# EAGLE board CT_schematic (EAGLE 7.6.0)

Size 100 x 80 mm. Coordinates in mm from the lower left corner, seen from the top.
Outline: 0,0 100,0 100,80 0,80 0,0
Copper layers (1*16): Top 0.035mm / dielectric 1.5mm / Bottom 0.035mm
Design rules "default": minimum track width 10mil, minimum drill 24mil, track to track 8mil, track to pad 8mil, pad to pad 8mil, via to via 8mil, smd to smd 8mil, copper to edge 40mil, drill to drill 8mil, minimum pad ring 10mil, minimum via ring 8mil, stop-mask expansion 4mil, vias tented up to drill 0mil, thermal gap 10mil

## Footprints (pad centres in the part's own frame; a part is rotated, then mirrored left to right if it is on the bottom)
C0603 = smd 0.8 x 0.8: 1 -0.762,0; 2 0.762,0
C0402 = smd 0.5 x 0.5: 1 -0.508,0; 2 0.508,0
C0805 = smd 1.2 x 1.3: 1 -1.016,0; 2 1.016,0
C1210 = smd 1.2 x 2.5: 1 -1.524,0; 2 1.524,0
2220 = smd 1.85 x 5.5: 1 -2.55,0; 2 2.55,0
EXV-9H = smd 3.505 x 1.676: 1 -2.857,0; 2 2.857,0
L0603 = smd 0.8 x 0.8: 1 -0.762,0; 2 0.762,0
WE-HCI_7030/7040/7050 = smd 2.5 x 3: 1 -2.45,0; 2 2.45,0
PJ-037B_PACKAGE = drill 3.7 square: 1 12,0 | drill 3.2 square: 2 6,0
R0603 = smd 0.8 x 0.8: 1 -0.762,0; 2 0.762,0
LQFP64 = smd 0.3 x 1.2: 1 -3.75,-5.75; 2 -3.25,-5.75; 3 -2.75,-5.75; 4 -2.25,-5.75; 5 -1.75,-5.75; 6 -1.25,-5.75; 7 -0.75,-5.75; 8 -0.25,-5.75; 9 0.25,-5.75; 10 0.75,-5.75; 11 1.25,-5.75; 12 1.75,-5.75; 13 2.25,-5.75; 14 2.75,-5.75; 15 3.25,-5.75; 16 3.75,-5.75; 33 3.75,5.75; 34 3.25,5.75; 35 2.75,5.75; 36 2.25,5.75; 37 1.75,5.75; 38 1.25,5.75; 39 0.75,5.75; 40 0.25,5.75; 41 -0.25,5.75; 42 -0.75,5.75; 43 -1.25,5.75; 44 -1.75,5.75; 45 -2.25,5.75; 46 -2.75,5.75; 47 -3.25,5.75; 48 -3.75,5.75 | smd 1.2 x 0.3: 17 5.75,-3.75; 18 5.75,-3.25; 19 5.75,-2.75; 20 5.75,-2.25; 21 5.75,-1.75; 22 5.75,-1.25; 23 5.75,-0.75; 24 5.75,-0.25; 25 5.75,0.25; 26 5.75,0.75; 27 5.75,1.25; 28 5.75,1.75; 29 5.75,2.25; 30 5.75,2.75; 31 5.75,3.25; 32 5.75,3.75; 49 -5.75,3.75; 50 -5.75,3.25; 51 -5.75,2.75; 52 -5.75,2.25; 53 -5.75,1.75; 54 -5.75,1.25; 55 -5.75,0.75; 56 -5.75,0.25; 57 -5.75,-0.25; 58 -5.75,-0.75; 59 -5.75,-1.25; 60 -5.75,-1.75; 61 -5.75,-2.25; 62 -5.75,-2.75; 63 -5.75,-3.25; 64 -5.75,-3.75
SSOP-28 = smd 1.5 x 0.4: 1 -3.625,4.225; 2 -3.625,3.575; 3 -3.625,2.925; 4 -3.625,2.275; 5 -3.625,1.625; 6 -3.625,0.975; 7 -3.625,0.325; 8 -3.625,-0.325; 9 -3.625,-0.975; 10 -3.625,-1.625; 11 -3.625,-2.275; 12 -3.625,-2.925; 13 -3.625,-3.575; 14 -3.625,-4.225; 15 3.625,-4.225; 16 3.625,-3.575; 17 3.625,-2.925; 18 3.625,-2.275; 19 3.625,-1.625; 20 3.625,-0.975; 21 3.625,-0.325; 22 3.625,0.325; 23 3.625,0.975; 24 3.625,1.625; 25 3.625,2.275; 26 3.625,2.925; 27 3.625,3.575; 28 3.625,4.225
FCI_10118193-0001LF = smd 0.4 x 1.35: 1 -1.3,2.675; 2 -0.65,2.675; 3 0,2.675; 4 0.65,2.675; 5 1.3,2.675 | smd 1.6 x 1.4: 6 -3.2,2.45; 7 3.2,2.45 | smd 1.9 x 1.9: 8 -1.2,0; 9 1.2,0 | hole 0.5: -3.3,0; 3.3,0
SON-8 = smd 0.35 x 0.85: 1 -0.975,-1.475; 2 -0.325,-1.475; 3 0.325,-1.475; 4 0.975,-1.475; 5 0.975,1.475; 6 0.325,1.475; 7 -0.325,1.475; 8 -0.975,1.475 | smd 2.4 x 1.65: PAD 0,0
182-009-MALE = drill 1.194 pad 1.524 octagon: 1 -5.537,10.923; 2 -2.769,10.923; 3 0,10.923; 4 2.769,10.923; 5 5.537,10.923; 6 -4.153,8.08; 7 -1.384,8.08; 8 1.384,8.08; 9 4.153,8.08 | hole 3.048: -12.446,9.501; 12.446,9.501
USB-A-H = drill 0.914: 1 2.718,3.493; 2 2.718,1.003; 3 2.718,-1.003; 4 2.718,-3.493 | drill 2.311: 5 0,-6.566; 6 0,6.566
SOT143B = smd 1 x 0.7: 1 -0.75,-1 | smd 0.6 x 0.7: 2 0.95,-1; 3 0.95,1; 4 -0.95,1
QFN-28 = smd 0.813 x 0.305: 1 -2.451,1.5; 2 -2.451,1; 3 -2.451,0.5; 4 -2.451,0; 5 -2.451,-0.5; 6 -2.451,-1; 7 -2.451,-1.5; 15 2.451,-1.5; 16 2.451,-1; 17 2.451,-0.5; 18 2.451,0; 19 2.451,0.5; 20 2.451,1; 21 2.451,1.5 | smd 0.305 x 0.813: 8 -1.5,-2.451; 9 -1,-2.451; 10 -0.5,-2.451; 11 0,-2.451; 12 0.5,-2.451; 13 1,-2.451; 14 1.5,-2.451; 22 1.5,2.451; 23 1,2.451; 24 0.5,2.451; 25 0,2.451; 26 -0.5,2.451; 27 -1,2.451; 28 -1.5,2.451 | smd 3.607 x 3.607: 29 0,0
SJ-43515TS-SMT-TR = smd 2.2 x 3: 1 0.6,-7.4; 4 3.4,-7.4 | smd 3 x 3: 2 12.8,-7.4; 5 17,-3 | smd 2 x 3: 3 5.3,0; 6 2.5,0 | drill 1.8: P$7 4.5,-3.69; P$8 11.54,-3.69
ABS07-32.768KHZ-7-T = smd 1.1 x 2.4: 1 -2.5,0; 2 0,0
ABLS-12.288MHZ-B4-T = smd 5.6 x 2.8: 1 -3.81,0; 2 5.69,0
ASEK = smd 1.4 x 1: 1 -1.1,-0.8; 2 1.1,-0.8; 3 1.1,0.8; 4 -1.1,0.8
ASFL1 = smd 1.7 x 1.5: 1 -1.27,-1.1; 2 1.27,-1.1; 3 1.27,1.1; 4 -1.27,1.1
QFN-16_EP = smd 0.805 x 0.3: 1 -1.452,0.75; 2 -1.452,0.25; 3 -1.452,-0.25; 4 -1.452,-0.75; 9 1.452,-0.75; 10 1.452,-0.25; 11 1.452,0.25; 12 1.452,0.75 | smd 0.3 x 0.805: 5 -0.75,-1.452; 6 -0.25,-1.452; 7 0.25,-1.452; 8 0.75,-1.452; 13 0.75,1.452; 14 0.25,1.452; 15 -0.25,1.452; 16 -0.75,1.452 | smd 1.55 x 1.55: 17 0,0
SON-6 = smd 0.55 x 0.3: 1 -0.355,0.5 | smd 0.52 x 0.3: 2 -0.37,0; 3 -0.37,-0.5; 4 0.37,-0.5; 5 0.37,0; 6 0.37,0.5
SW_4-1437565-2 = smd 1.4 x 2.1: 1 -2.23,4.55; 2 -2.23,-4.55; 3 2.23,4.55; 4 2.23,-4.55
LGM67K-G1J2-24-Z = smd 0.8 x 1.4: A -2,0; C 0,0
NC7SZ125M5X = smd 1.3 x 0.7: 1 -1.3,0.95; 2 -1.3,0; 3 -1.3,-0.95; 4 1.3,-0.95; 5 1.3,0.95

## Placement (x,y rotation side)
C1  1e-06  [C0603]  -73.66,78.74 0 top  (outside the outline)
C2  1e-07  [C0603]  -77.47,78.74 0 top  (outside the outline)
C3  1e-07  [C0603]  -81.28,78.74 0 top  (outside the outline)
C4  1e-07  [C0603]  -85.09,78.74 0 top  (outside the outline)
C5  1e-07  [C0603]  -15.24,83.82 0 top  (outside the outline)
C6  1e-07  [C0603]  -19.05,83.82 0 top  (outside the outline)
C7  4.7e-06  [C0603]  -69.85,78.74 0 top  (outside the outline)
C8  1e-08  [C0603]  -22.86,83.82 0 top  (outside the outline)
C9  1e-06  [C0603]  -26.67,83.82 0 top  (outside the outline)
C10  1e-07  [C0402]  -80.01,83.82 0 top  (outside the outline)
C11  4.7e-06  [C0805]  -34.29,72.39 0 top  (outside the outline)
C12  1e-07  [C0402]  -83.82,83.82 0 top  (outside the outline)
C13  1e-07  [C0402]  -87.63,83.82 0 top  (outside the outline)
C14  1e-07  [C0402]  -15.24,88.9 0 top  (outside the outline)
C15  1e-07  [C0402]  -19.05,88.9 0 top  (outside the outline)
C16  1e-07  [C0402]  -22.86,88.9 0 top  (outside the outline)
C17  1e-07  [C0402]  -26.67,88.9 0 top  (outside the outline)
C18  1e-07  [C0402]  -30.48,88.9 0 top  (outside the outline)
C19  1e-07  [C0402]  -34.29,88.9 0 top  (outside the outline)
C20  2.2e-05  [C1210]  -16.51,73.66 0 top  (outside the outline)
C21  2.2e-05  [C1210]  -22.86,73.66 0 top  (outside the outline)
C22  1e-09  [C0402]  -38.1,88.9 0 top  (outside the outline)
C23  1e-09  [C0402]  -41.91,88.9 0 top  (outside the outline)
C24  1e-07  [C0402]  -45.72,88.9 0 top  (outside the outline)
C25  1e-07  [C0402]  -49.53,88.9 0 top  (outside the outline)
C26  1e-07  [C0402]  -53.34,88.9 0 top  (outside the outline)
C27  1e-07  [C0402]  -57.15,88.9 0 top  (outside the outline)
C28  1e-07  [C0402]  -60.96,88.9 0 top  (outside the outline)
C29  1e-05  [C0805]  -39.37,72.39 0 top  (outside the outline)
C30  1e-05  [C0805]  -44.45,72.39 0 top  (outside the outline)
C31  1e-05  [C0805]  -49.53,72.39 0 top  (outside the outline)
C32  1e-05  [C0805]  -54.61,72.39 0 top  (outside the outline)
C33  1e-05  [C0805]  -59.69,72.39 0 top  (outside the outline)
C34  2.2e-11  [C0402]  -72.39,83.82 0 top  (outside the outline)
C35  2.2e-11  [C0402]  -76.2,83.82 0 top  (outside the outline)
C36  1e-08  [C0402]  -64.77,88.9 0 top  (outside the outline)
C37  1e-08  [C0402]  -68.58,88.9 0 top  (outside the outline)
C38  1e-08  [C0402]  -72.39,88.9 0 top  (outside the outline)
C39  1e-05  [C0805]  -64.77,72.39 0 top  (outside the outline)
C40  1e-06  [C0603]  -30.48,83.82 0 top  (outside the outline)
C41  1e-07  [C0402]  -76.2,88.9 0 top  (outside the outline)
C42  6.8e-05  [2220]  -80.01,43.18 0 top  (outside the outline)
C43  1e-07  [C0402]  -80.01,88.9 0 top  (outside the outline)
C44  0.0001  [EXV-9H]  -82.55,57.15 0 top  (outside the outline)
C45  0.0001  [EXV-9H]  -17.78,66.04 0 top  (outside the outline)
C46  1e-08  [C0402]  -83.82,88.9 0 top  (outside the outline)
F1  240.0  [L0603]  -34.29,83.82 0 top  (outside the outline)
I1  3.3e-06  [WE-HCI_7030/7040/7050]  -52.07,44.45 0 top  (outside the outline)
J1  PJ-037B  [PJ-037B_PACKAGE]  -27.94,45.72 0 top  (outside the outline)
R2  1000.0  [R0603]  -38.1,83.82 0 top  (outside the outline)
R4  4700.0  [R0603]  -41.91,83.82 0 top  (outside the outline)
R5  2200.0  [R0603]  -45.72,83.82 0 top  (outside the outline)
R6  2200.0  [R0603]  -49.53,83.82 0 top  (outside the outline)
R7  10000.0  [R0603]  -15.24,78.74 0 top  (outside the outline)
R8  4700.0  [R0603]  -53.34,83.82 0 top  (outside the outline)
R9  10000.0  [R0603]  -20.32,78.74 0 top  (outside the outline)
R10  10000.0  [R0603]  -25.4,78.74 0 top  (outside the outline)
R11  10000.0  [R0603]  -30.48,78.74 0 top  (outside the outline)
R12  100000.0  [R0603]  -69.85,72.39 0 top  (outside the outline)
R13  47000.0  [R0603]  -35.56,78.74 0 top  (outside the outline)
R14  47000.0  [R0603]  -40.64,78.74 0 top  (outside the outline)
R15  47000.0  [R0603]  -45.72,78.74 0 top  (outside the outline)
R16  680.0  [R0603]  -57.15,83.82 0 top  (outside the outline)
R17  20000.0  [R0603]  -50.8,78.74 0 top  (outside the outline)
R18  91000.0  [R0603]  -55.88,78.74 0 top  (outside the outline)
R19  300000.0  [R0603]  -74.93,72.39 0 top  (outside the outline)
R20  10000.0  [R0603]  -60.96,78.74 0 top  (outside the outline)
R21  10000.0  [R0603]  -66.04,78.74 0 top  (outside the outline)
R22  9100.0  [R0603]  -60.96,83.82 0 top  (outside the outline)
R23  680000.0  [R0603]  -80.01,72.39 0 top  (outside the outline)
R24  120000.0  [R0603]  -85.09,72.39 0 top  (outside the outline)
U1  STM32F303RCT6  [LQFP64]  -40.64,44.45 0 top  (outside the outline)
U2  FT232RL-REEL  [SSOP-28]  -77.47,7.62 0 top  (outside the outline)
U3  10118193-0001LF  [FCI_10118193-0001LF]  -52.07,55.88 0 top  (outside the outline)
U4  PCF85063TP/1Z  [SON-8]  -86.36,64.77 0 top  (outside the outline)
U5  ST3241EBPR  [SSOP-28]  -19.05,30.48 0 top  (outside the outline)
U6  182-009-113R531  [182-009-MALE]  -36.83,6.35 0 top  (outside the outline)
U7  61400416021  [USB-A-H]  -59.69,8.89 0 top  (outside the outline)
U8  prtr5v0u2ax  [SOT143B]  -24.13,93.98 0 top  (outside the outline)
U9  WM8731CLSEFL  [QFN-28]  -80.01,64.77 0 top  (outside the outline)
U10  SJ-43515TS-SMT-TR  [SJ-43515TS-SMT-TR]  -50.8,31.75 0 top  (outside the outline)
U11  SJ-43515TS-SMT-TR  [SJ-43515TS-SMT-TR]  -78.74,31.75 0 top  (outside the outline)
U12  ABS07-32.768KHZ-7-T  [ABS07-32.768KHZ-7-T]  -58.42,66.04 0 top  (outside the outline)
U13  ABLS-12.288MHZ-B4-T  [ABLS-12.288MHZ-B4-T]  -35.56,66.04 0 top  (outside the outline)
U14  ASEK-32.768KHz-ECST  [ASEK]  -73.66,57.15 0 top  (outside the outline)
U15  ASFL1-12MHZ-NCS  [ASFL1]  -26.67,57.15 0 top  (outside the outline)
U16  ASFL1-25MHZ-NCS  [ASFL1]  -43.18,57.15 0 top  (outside the outline)
U17  LTC3601EUD#PBF  [QFN-16_EP]  -66.04,83.82 0 top  (outside the outline)
U18  TPS3895ADRYR  [SON-6]  -27.94,92.71 0 top  (outside the outline)
U19  4-1437565-2  [SW_4-1437565-2]  -71.12,44.45 0 top  (outside the outline)
U20  Q65110A2395  [LGM67K-G1J2-24-Z]  -67.31,64.77 0 top  (outside the outline)
U21  nc7sz125m5x  [NC7SZ125M5X]  -27.94,72.39 0 top  (outside the outline)

## Library data of the parts
C1-C46 F1 I1 J1 R2 R4-R24 U1-U21 = circuit_tree

## Nets
CLK_CRYSTAL_U4_1: U4.1 U12.1
CLK_CRYSTAL_U4_2: U4.2 U12.2
CLK_CRYSTAL_U9_1: C34.1 U9.1 U13.1
CLK_CRYSTAL_U9_2: C35.1 U9.2 U13.2
CLK_U1_3: U1.3 U14.3
CLK_U1_5: U1.5 U16.3
CLK_U2_27: U2.27 U15.3
GND: C1.2 C2.2 C3.2 C4.2 C5.2 C6.2 C7.2 C8.2 C9.2 C10.2 C11.2 C12.2 C13.2 C14.2 C15.2 C18.2 C19.2 C23.2 C24.2 C25.2 C26.2 C27.2 C28.2 C29.2 C30.2 C31.2 C32.2 C33.2 C34.2 C35.2 C36.2 C37.2 C38.2 C39.2 C40.2 C42.1 C42.2 C43.2 C44.2 C45.2 C46.2 J1.2 R2.2 R7.2 R10.2 R13.2 R14.2 R15.2 R17.2 R19.2 R22.2 R24.2 U1.12 U1.31 U1.47 U1.63 U2.7 U2.18 U2.21 U2.25 U2.26 U3.5 U3.6 U3.7 U3.8 U3.9 U4.4 U4.PAD U5.23 U5.25 U6.5 U7.4 U7.5 U7.6 U8.1 U9.4 U9.15 U9.19 U9.25 U9.26 U9.29 U10.1 U11.1 U14.2 U15.2 U16.2 U17.1 U17.9 U17.17 U18.2 U20.C U21.1 U21.3
NET_U1_7: R4.1 U1.7 U21.4
NET_U1_13: C8.1 C9.1 F1.1 U1.13
NET_U1_49: R6.1 U1.49 U4.5
NET_U1_50: R5.1 U1.50 U4.6
NET_U1_60: R7.1 U1.60
NET_U1_61: U20.A
NET_U1_62: U19.3 U19.4
NET_U2_14: R9.1 U2.14
NET_U2_17: C12.1 U2.17
NET_U2_19: R10.1 U2.19
NET_U3_1: R8.1 U3.1
NET_U3_2: U2.16 U3.2
NET_U3_3: U2.15 U3.3
NET_U3_19: R8.2
NET_U4_3: R11.1 U4.3
NET_U5_1: C17.1 U5.1
NET_U5_2: C17.2 U5.2
NET_U5_3: C19.1 U5.3
NET_U5_22: R12.1 U5.22
NET_U5_24: C16.2 U5.24
NET_U5_27: C18.1 U5.27
NET_U5_28: C16.1 U5.28
NET_U6_2: U5.4 U6.2
NET_U6_3: U5.9 U6.3
NET_U6_7: U5.5 U6.7
NET_U6_8: U5.10 U6.8
NET_U8_4: U7.1 U8.4
NET_U9_9: U9.9
NET_U9_20: C28.1 C33.1 U9.20
NET_U10_2: C21.1 R14.1 U10.2
NET_U10_5: C20.1 R13.1 U10.5
NET_U10_13: C20.2
NET_U10_14: C21.2
NET_U11_5: C22.1 C23.1 R15.1 R16.1 U11.5
NET_U11_21: R16.2
NET_U11_22: C22.2
NET_U17_3: C41.2 I1.1 U17.3 U17.4
NET_U17_6: C41.1 U17.6
NET_U17_7: C40.1 U17.7 U17.12
NET_U17_10: R19.1 U17.10
NET_U17_11: R17.1 R18.1 U17.11
NET_U17_14: U17.14
NET_U17_ATNET_3: I1.2 R18.2
NET_U18_1: R21.1 R22.1 U18.1
NET_U18_3: R23.2 R24.1 U18.3
NET_U18_4: R20.1 U18.4 U21.2
NET_U19_1: R2.1 U19.1 U19.2
PROC_I2S2_CK: U1.34 U9.7
PROC_I2S2_EXT_SD: U1.35 U9.10
PROC_I2S2_SD: U1.36 U9.8
PROC_I2S2_WS: U1.33 U9.9 U9.11
PROC_UART4_RX: U1.52 U2.1
PROC_UART4_TX: U1.51 U2.5
PROC_UART5_RX: U1.54 U5.19
PROC_UART5_TX: U1.53 U5.14
PROC_USB_DM: U1.44 U7.2 U8.3
PROC_USB_DP: U1.45 U7.3 U8.2
VCC_S1_4V9: C39.1 C44.1 C45.1 J1.1 U17.15 U17.16
VCC_TIER1_3V3: C1.1 C2.1 C3.1 C4.1 C5.1 C6.1 C7.1 C10.1 C11.1 C13.1 C14.1 C15.1 C24.1 C25.1 C26.1 C27.1 C29.1 C30.1 C31.1 C32.1 C36.1 C37.1 C38.1 C42.2 C43.1 C46.1 F1.2 I1.2 R4.2 R5.2 R6.2 R9.2 R11.2 R12.2 R18.2 R20.2 R21.2 R23.1 U1.1 U1.19 U1.32 U1.48 U1.64 U2.4 U2.20 U4.8 U5.26 U9.3 U9.5 U9.12 U9.18 U14.4 U15.4 U16.4 U17.8 U18.6 U21.5

## Tracks (layer width: path | path; a pad name or v marks a point on that pad's centre or on a via)
CLK_CRYSTAL_U4_1  (1 unrouted)
CLK_CRYSTAL_U4_2  (1 unrouted)
CLK_CRYSTAL_U9_1  (2 unrouted)
CLK_CRYSTAL_U9_2  (2 unrouted)
CLK_U1_3  (1 unrouted)
CLK_U1_5  (1 unrouted)
CLK_U2_27  (1 unrouted)
GND  (92 unrouted)
NET_U1_7  (2 unrouted)
NET_U1_13  (3 unrouted)
NET_U1_49  (2 unrouted)
NET_U1_50  (2 unrouted)
NET_U1_60  (1 unrouted)
NET_U1_62  (1 unrouted)
NET_U2_14  (1 unrouted)
NET_U2_17  (1 unrouted)
NET_U2_19  (1 unrouted)
NET_U3_1  (1 unrouted)
NET_U3_2  (1 unrouted)
NET_U3_3  (1 unrouted)
NET_U4_3  (1 unrouted)
NET_U5_1  (1 unrouted)
NET_U5_2  (1 unrouted)
NET_U5_3  (1 unrouted)
NET_U5_22  (1 unrouted)
NET_U5_24  (1 unrouted)
NET_U5_27  (1 unrouted)
NET_U5_28  (1 unrouted)
NET_U6_2  (1 unrouted)
NET_U6_3  (1 unrouted)
NET_U6_7  (1 unrouted)
NET_U6_8  (1 unrouted)
NET_U8_4  (1 unrouted)
NET_U9_20  (2 unrouted)
NET_U10_2  (2 unrouted)
NET_U10_5  (2 unrouted)
NET_U11_5  (4 unrouted)
NET_U17_3  (3 unrouted)
NET_U17_6  (1 unrouted)
NET_U17_7  (2 unrouted)
NET_U17_10  (1 unrouted)
NET_U17_11  (2 unrouted)
NET_U17_ATNET_3  (1 unrouted)
NET_U18_1  (2 unrouted)
NET_U18_3  (2 unrouted)
NET_U18_4  (2 unrouted)
NET_U19_1  (2 unrouted)
PROC_I2S2_CK  (1 unrouted)
PROC_I2S2_EXT_SD  (1 unrouted)
PROC_I2S2_SD  (1 unrouted)
PROC_I2S2_WS  (2 unrouted)
PROC_UART4_RX  (1 unrouted)
PROC_UART4_TX  (1 unrouted)
PROC_UART5_RX  (1 unrouted)
PROC_UART5_TX  (1 unrouted)
PROC_USB_DM  (2 unrouted)
PROC_USB_DP  (2 unrouted)
VCC_S1_4V9  (5 unrouted)
VCC_TIER1_3V3  (56 unrouted)